# Altium PCB LPCB278R0.PcbDoc
Units mm, origin at the board's own origin, x right, y up, seen from the top; angles counter-clockwise.
Board outline 96 x 79 mm, 2 copper layers (Top Layer, Bottom Layer); 75 components, 36 nets, 248 pads, 492 vias.
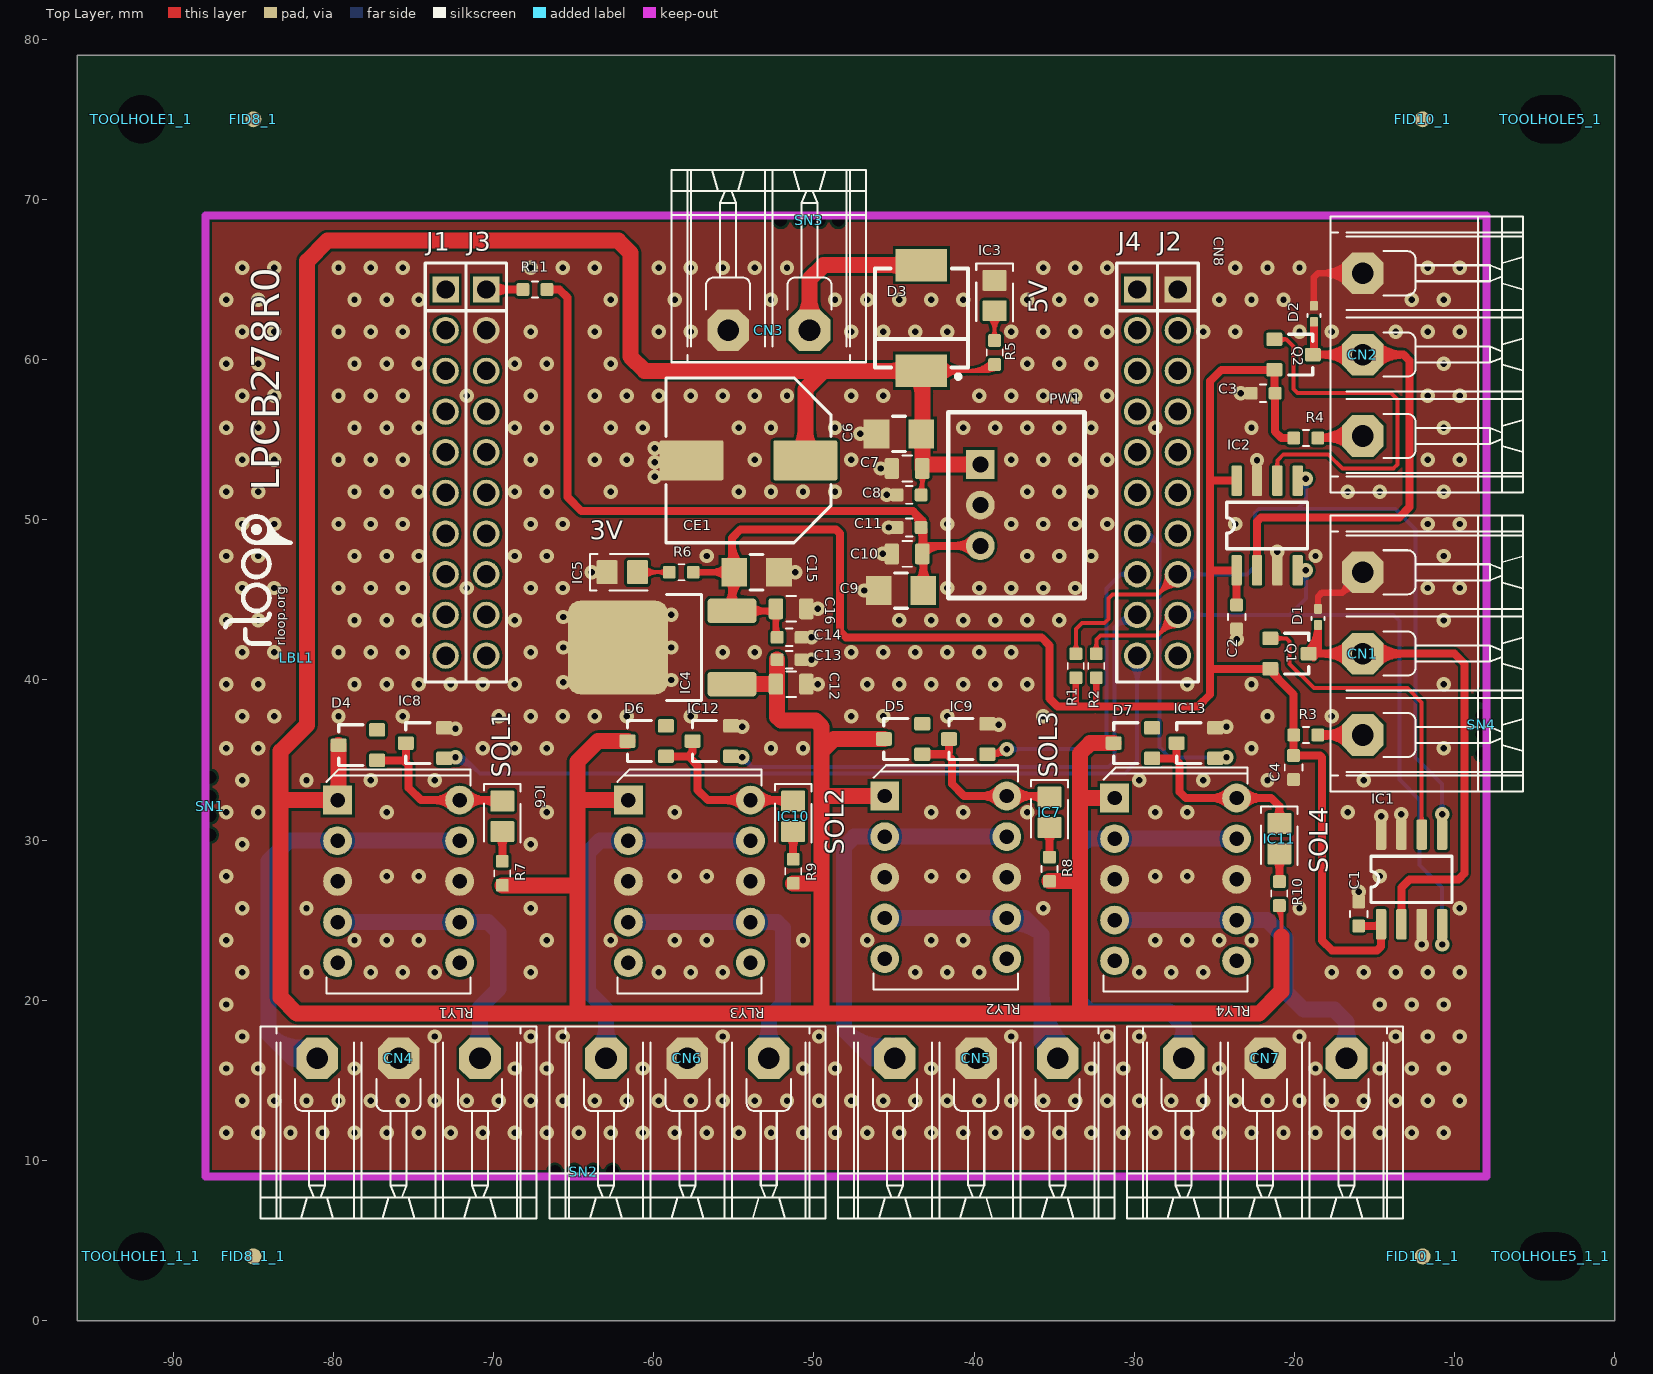
[diagram p0: Top Layer view]
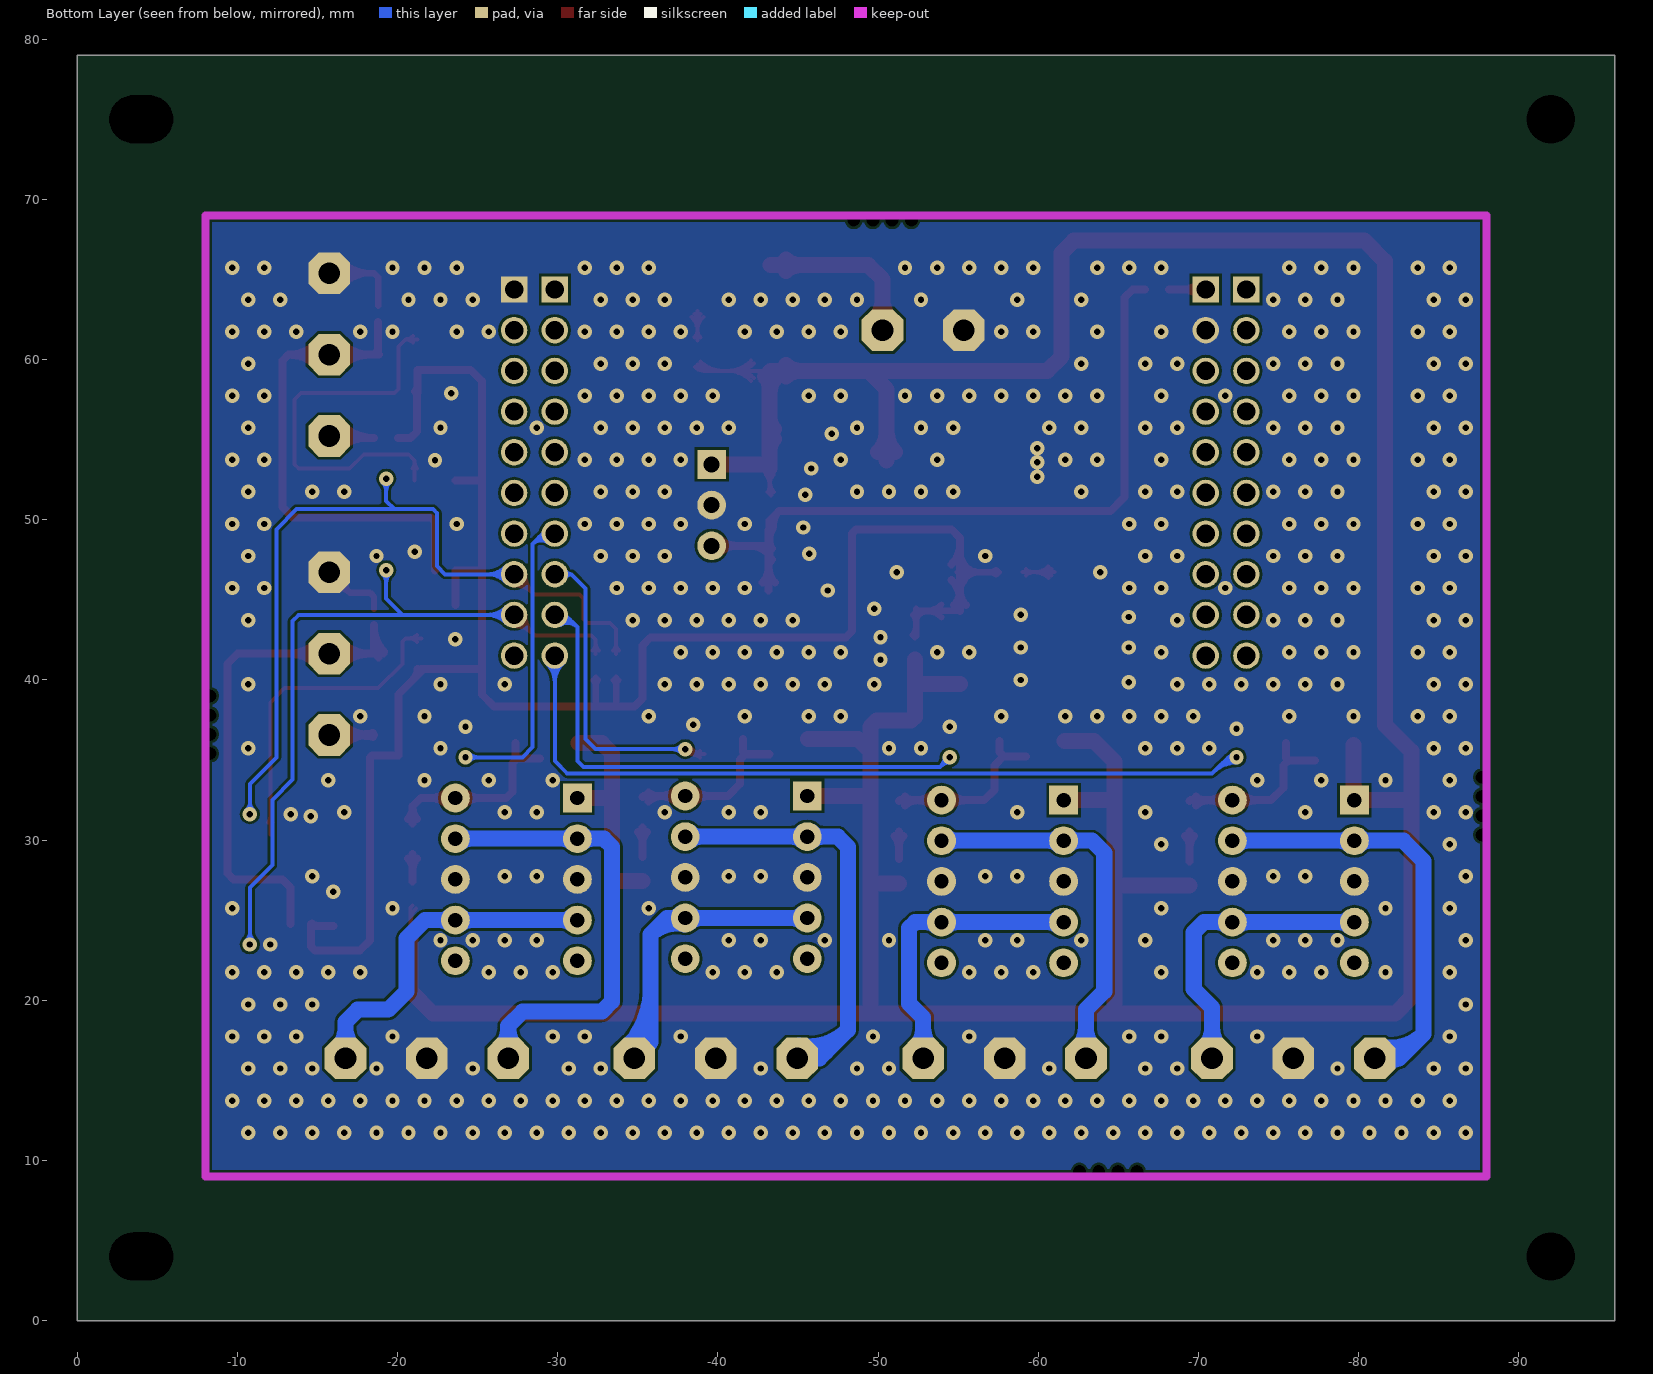
[diagram p1: Bottom Layer view, seen from below]

## Layer stack, top to bottom
Top Layer: signal copper 0.0356
Dielectric: dielectric 0.32, FR-4, Dk 4.8
Bottom Layer: signal copper 0.0356

## Board outline
-96,0 -96,79 0,79 0,0

## Design rules (kind name [scope] priority, off if disabled: settings)
Clearance [All] p1: gap=0.16
Height [All] p1 off: minheight=0 maxheight=25.4 prefheight=12.7
HoleSize [All] p1: absolutevalues=TRUE maxlimit=6 minlimit=0.025 maxpercent=80.000 minpercent=20.000
MinimumSolderMaskSliver [All] p1 off: minsoldermaskwidth=0.1
PlaneConnect PlaneConnect_1 [IsVia] p1: planeconnectstyle=Direct reliefexpansion=0.508 reliefentries=4 reliefconductorwidth=0.254 reliefairgap=0.254
PlaneConnect [All] p2: planeconnectstyle=Relief reliefexpansion=0.508 reliefentries=4 reliefconductorwidth=0.254 reliefairgap=0.254
PolygonConnect [IsVia] p1: connectstyle=Direct reliefconductorwidth=0.254 reliefentries=4 polygonreliefangle="90 Angle" airgapwidth=0.254
PolygonConnect PolygonConnect_1 [All] p2: connectstyle=Direct reliefconductorwidth=0.254 reliefentries=4 polygonreliefangle="90 Angle" airgapwidth=0.254
RoutingVias [All] p1: holewidth=0.6 width=1.2 viastyle="Through Hole" minholewidth=0.3 minwidth=0.6 maxholewidth=1 maxwidth=2
SilkToSilkClearance [All] p1 off: silktosilkclearance=0.1
SilkToSolderMaskClearance [IsPad] p1 off: minsilkscreentomaskgap=0.1 clearancetoexposedcopper=TRUE
SolderMaskExpansion [All] p1: expansion=0.102
Width [All] p1: maxlimit=1 minlimit=0.16 preferedwidth=0.2
22 further rules are at their usual default settings.

## Classes and differential pairs
component class "LPCB278 - TOP": LBL1 SN1 SN2 SN3 SN4
component class "U_LPCB278 - 1 WIRE": C1 C2 C3 C4 CN1 CN2 D1 D2 IC1 IC2 Q1 Q2 R1 R2 R3 R4
component class "U_LPCB278 - POWER": C6 C7 C8 C9 C10 C11 C12 C13 C14 C15 C16 CE1 CN3 D3 IC3 IC4 IC5 PW1 R5 R6
component class "U_LPCB278 - RELAYS": CN4 CN5 CN6 CN7 D4 D5 D6 D7 IC6 IC7 IC8 IC9 IC10 IC11 IC12 IC13 R7 R8 R9 R10 RLY1 RLY2 RLY3 RLY4
component class "U_LPCB278 - RM57 LAUNCH": CN8 R11

## Components (designator, comment, footprint, x,y, rotation, side; value= is the part's Value field where it differs from the comment)
C1 "100n / 50V / 10% / SMD 0603" LFP011__CC1608-0603-IPC7351_B -15.991,25.383 r90 top
C2 "100n / 50V / 10% / SMD 0603" LFP011__CC1608-0603-IPC7351_B -23.611,43.925 r270 top
C3 "1uF / 10V / 10% / SMD 0603" LFP011__CC1608-0603-IPC7351_B -21.96,57.895 r180 top
C4 "1uF / 10V / 10% / SMD 0603" LFP011__CC1608-0603-IPC7351_B -20.055,34.527 r270 top
C6 "10uF / 50V / 10% / SMD 1206" LFP043__CC3216-1206 -44.693,55.355 r180 top
C7 "1uF / 50V / 10% / SMD 0805" LFP010__CC2012-0805-IPC7351_B -44.185,53.196 r180 top
C8 "100nF / 50V / 10% / SMD 0603" LFP011__CC1608-0603-IPC7351_B -44.058,51.545 r180 top
C9 "10uF / 50V / 10% / SMD 1206" LFP043__CC3216-1206 -44.566,45.576 r180 top
C10 "1uF / 50V / 10% / SMD 0805" LFP010__CC2012-0805-IPC7351_B -44.185,47.862 r180 top
C11 "100nF / 50V / 10% / SMD 0603" LFP011__CC1608-0603-IPC7351_B -44.058,49.513 r180 top
C12 "1uF / 50V / 10% / SMD 0805" LFP010__CC2012-0805-IPC7351_B -51.424,39.734 r0 top
C13 "100nF / 50V / 10% / SMD 0603" LFP011__CC1608-0603-IPC7351_B -51.551,41.258 r0 top
C14 "100nF / 50V / 10% / SMD 0603" LFP011__CC1608-0603-IPC7351_B -51.551,42.655 r0 top
C15 "10uF / 50V / 10% / SMD 1206" LFP043__CC3216-1206 -53.583,46.719 r0 top
C16 "1uF / 50V / 10% / SMD 0805" LFP010__CC2012-0805-IPC7351_B -51.424,44.433 r0 top
CE1 "330uF / 35V / 20% / SMD 10x10" LFP041__NICHICON_WT_10X10 -54.091,53.704 r180 top
CN1 "691 313 510 003" "691 313 510 003" -15.737,36.559 r90 top locked
CN2 "691 313 510 003" "691 313 510 003" -15.737,55.228 r90 top locked
CN3 "691 313 510 002" "691 313 510 002" -50.281,61.832 r180 top
CN4 "691 313 510 003" "691 313 510 003" -81.015,16.366 r0 top locked
CN5 "691 313 510 003" "691 313 510 003" -44.947,16.366 r0 top locked
CN6 "691 313 510 003" "691 313 510 003" -62.981,16.366 r0 top locked
CN7 "691 313 510 003" "691 313 510 003" -26.913,16.366 r0 top locked
CN8 "RM57LAUNCHXL_BP_40P_1" RM57LAUNCHXL_BP_40P_1 -73,64.372 r0 top locked
D1 "TPD1E10B09" LFP157__R-PX1SON-N2 -18.531,43.925 r270 top
D2 "TPD1E10B09" LFP157__R-PX1SON-N2 -18.785,62.848 r270 top
D3 "S3M-E3/57T" LFP040__DO-214AB -43.296,62.594 r90 top
D4 "BAS16" LFP021__SOT23 -78.475,35.924 r90 top
D5 "BAS16" LFP021__SOT23 -44.439,36.305 r90 top
D6 "BAS16" LFP021__SOT23 -60.441,36.178 r90 top
D7 "BAS16" LFP021__SOT23 -30.088,36.051 r90 top
FID8_1 "FIDUCIAL" LFP113__FIDUCIAL -85,75 r0 top
FID8_1_1 "FIDUCIAL" LFP113__FIDUCIAL -85,4 r0 top
FID10_1 "FIDUCIAL" LFP113__FIDUCIAL -12,75 r0 top
FID10_1_1 "FIDUCIAL" LFP113__FIDUCIAL -12,4 r0 top
IC1 "DS2482S-100+T&R" LFP069__R-8G -12.689,27.542 r0 top
IC2 "DS2482S-100+T&R" LFP069__R-8G -21.706,49.64 r0 top
IC3 "EL-17-21VGC/TR8" CR2012-0805-LED -38.724,63.991 r270 top
IC4 "NCV4274DT33RKG" LFP019__369A-13 -59.679,42.02 r90 top
IC5 "EL-17-21VGC/TR8" CR2012-0805-LED -61.965,46.719 r0 top
IC6 "EL-17-21VGC/TR8" CR2012-0805-LED -69.458,31.479 r270 top
IC7 "EL-17-21VGC/TR8" CR2012-0805-LED -35.295,31.733 r270 top
IC8 "NUD3124LT1G" LFP021__SOT23 -74.284,36.051 r90 top
IC9 "NUD3124LT1G" LFP021__SOT23 -40.375,36.305 r90 top
IC10 "EL-17-21VGC/TR8" CR2012-0805-LED -51.297,31.479 r270 top
IC11 "EL-17-21VGC/TR8" CR2012-0805-LED -20.944,30.082 r270 top
IC12 "NUD3124LT1G" LFP021__SOT23 -56.377,36.178 r90 top
IC13 "NUD3124LT1G" LFP021__SOT23 -26.151,36.051 r90 top
LBL1 "RLOOP_LOGO" RLOOP_LOGO -82.285,41.385 r90 top
PW1 "173010542" 173010542 -39.613,50.91 r270 top
Q1 "BSS84" LFP021__SOT23 -20.309,41.639 r270 top
Q2 "BSS84" LFP021__SOT23 -20.055,60.308 r270 top
R1 "4.7K / 0.1W / 1% / SMD 0603" LFP020__CR1608-0603-IPC7351_B -33.644,40.877 r270 top
R2 "4.7K / 0.1W / 1% / SMD 0603" LFP020__CR1608-0603-IPC7351_B -32.374,40.877 r270 top
R3 "0R / 0.1W / SMD 0603" LFP020__CR1608-0603-IPC7351_B -19.293,36.559 r0 top
R4 "0R / 0.1W / SMD 0603" LFP020__CR1608-0603-IPC7351_B -19.293,55.101 r0 top
R5 "2.2K / 0.1W / 1% / SMD 0603" LFP020__CR1608-0603-IPC7351_B -38.724,60.435 r270 top
R6 "2.2K / 0.1W / 1% / SMD 0603" LFP020__CR1608-0603-IPC7351_B -58.282,46.719 r0 top
R7 "2.2K / 0.1W / 1% / SMD 0603" LFP020__CR1608-0603-IPC7351_B -69.458,27.923 r90 top
R8 "2.2K / 0.1W / 1% / SMD 0603" LFP020__CR1608-0603-IPC7351_B -35.295,28.177 r90 top
R9 "2.2K / 0.1W / 1% / SMD 0603" LFP020__CR1608-0603-IPC7351_B -51.297,28.05 r90 top
R10 "2.2K / 0.1W / 1% / SMD 0603" LFP020__CR1608-0603-IPC7351_B -20.944,26.653 r90 top
R11 "0R / 0.1W / SMD 0603" LFP020__CR1608-0603-IPC7351_B -67.426,64.372 r0 top
RLY1 "TQ2-24" TQ2 -75.935,27.415 r270 top
RLY2 "TQ2-24" TQ2 -41.772,27.669 r270 top
RLY3 "TQ2-24" TQ2 -57.774,27.415 r270 top
RLY4 "TQ2-24" TQ2 -27.421,27.542 r270 top
SN1 "PCB_SNAPOUT_0.3MM" PCB_SNAPOUT_0.3MM -88,32.114 r270 top
SN2 "PCB_SNAPOUT_0.3MM" PCB_SNAPOUT_0.3MM -64.378,9 r0 top
SN3 "PCB_SNAPOUT_0.3MM" PCB_SNAPOUT_0.3MM -50.281,69 r180 top
SN4 "PCB_SNAPOUT_0.3MM" PCB_SNAPOUT_0.3MM -8,37.194 r90 top
TOOLHOLE1_1 "Comment" TOOL-1#1 -92,75 r0 top
TOOLHOLE1_1_1 "Comment" TOOL-1#1 -92,4 r0 top
TOOLHOLE5_1 "Comment" TOOL-1#2 -4,75 r0 top
TOOLHOLE5_1_1 "Comment" TOOL-1#2 -4,4 r0 top

## Footprints (in the part's own frame and the unit in brackets; to place one, negate y for a bottom-side part, rotate by r counter-clockwise, add the part's x,y. Pads: shape width x height; smd on the part's side, far side on the other; paste and mask are expansions set on the pad)
"691 313 510 002" [mm] "Connector, Pluggable Terminal Block, 5.08mm, 2 Way, PTH"
  oct 2.6x2.6 hole 1.35: 1(0,0) 2(5.08,0)
  silkscreen extent -3.54,-10 8.62,2
"691 313 510 003" [mm] "Connector, Pluggable Terminal Block, 5.08mm, 3 Way, PTH"
  oct 2.6x2.6 hole 1.35: 1(0,0) 2(5.08,0) 3(10.16,0)
  silkscreen extent -3.54,-10 13.7,2
173010542 [mm]
  rect 1.8x1.8 hole 1 paste-0.01: 1(-2.54,0)
  round 1.8 hole 1 paste-0.01: 2(0,0) 3(2.54,0)
  silkscreen extent -5.8,-2 5.8,6.5
CR2012-0805-LED [mm]
  rrect10% 1.3x1.5 smd paste-0.05: A(0.95,0) K(-0.95,0)
  silkscreen extent -2.01,-1.14 1.63,1.14
LFP010__CC2012-0805-IPC7351_B [mm]
  rrect25% 0.9x1.3 smd paste-0.01: 1(-0.95,0) 2(0.95,0)
  silkscreen extent -0.3,-0.8 0.3,0.8
LFP011__CC1608-0603-IPC7351_B [mm]
  rrect25% 0.8x0.8 smd: 1(-0.75,0) 2(0.75,0)
  silkscreen extent -0.2,-0.55 0.2,0.55
LFP019__369A-13 [mil]
  rrect25% 60x120 smd: 1(-90,-179.49) 3(90,-179.49)
  rrect25% 230x245 smd paste-196.85: 4(0,100.75)
  silkscreen extent -130,-104 130,-19
LFP020__CR1608-0603-IPC7351_B [mm]
  rrect25% 0.8x0.8 smd: 1(-0.75,0) 2(0.75,0)
  silkscreen extent -0.2,-0.5 0.2,0.5
LFP021__SOT23 [mm] "SOT-23; 3 Leads; Body 3.0 x 2.5 mm, inc. leads (LxW max)"
  rrect25% 0.85x1 smd paste-0.05: 1(-0.95,-1.2) 2(0.95,-1.2) 3(0,1.2)
  silkscreen extent -1.27,-0.3 1.28,1.2
LFP040__DO-214AB [mm]
  rect 2.032x3.2 smd: 1(-3.3,0) 2(3.3,0)
  silkscreen extent -3.8,-2.9 3.1,2.9
LFP041__NICHICON_WT_10X10 [mm]
  rrect10% 4x2.5 smd paste-0.02: 1(-3.55,0) 2(3.55,0)
  silkscreen extent -5.15,-5.15 5.15,5.15
LFP043__CC3216-1206 [mm]
  rect 1.6x1.8 smd paste-0.01: 1(-1.4,0) 2(1.4,0)
  silkscreen extent -0.4,-1.1 0.4,1.1
LFP069__R-8G [mm] "Small Outline; 8 Leads; Body Width 3.9 mm; Pitch 1.27 mm"
  rrect25% 0.65x1.9 smd paste-0.05: 1(-1.905,-2.8) 2(-0.635,-2.8) 3(0.635,-2.8) 4(1.905,-2.8) 5(1.905,2.8) 6(0.635,2.8) 7(-0.635,2.8) 8(-1.905,2.8)
  silkscreen extent -2.52,-1.45 2.52,1.45
LFP113__FIDUCIAL [mm]
  round 1 smd paste-2 mask+1.5: 0(0,0)
LFP157__R-PX1SON-N2 [mm]
  rrect25% 0.6x0.5 smd: 2(0.5,0) G(-0.5,0)
  silkscreen extent 0,-0.4 0.2,0.4
PCB_SNAPOUT_0.3MM [mm]
  round 0.4 hole 0.8 unplated: 0(-1.8,0.3) 0(-0.6,0.3) 0(0.6,0.3) 0(1.8,0.3)
RLOOP_LOGO [mm]
  silkscreen extent 0.89,0.39 8.82,4.45
RM57LAUNCHXL_BP_40P_1 [mm]
  rect 1.65x1.65 hole 1.15: J1_1(0,0) J2_1(45.72,0) J3_1(2.54,0) J4_1(43.18,0)
  round 1.65 hole 1.15: J1_2(0,-2.54) J1_3(0,-5.08) J1_4(0,-7.62) J1_5(0,-10.16) J1_6(0,-12.7) J1_7(0,-15.24) J1_8(0,-17.78) J1_9(0,-20.32) J1_10(0,-22.86) J2_2(45.72,-2.54) J2_3(45.72,-5.08) J2_4(45.72,-7.62) J2_5(45.72,-10.16) J2_6(45.72,-12.7) J2_7(45.72,-15.24) J2_8(45.72,-17.78) J2_9(45.72,-20.32) J2_10(45.72,-22.86) J3_2(2.54,-2.54) J3_3(2.54,-5.08) J3_4(2.54,-7.62) J3_5(2.54,-10.16) J3_6(2.54,-12.7) J3_7(2.54,-15.24) J3_8(2.54,-17.78) J3_9(2.54,-20.32) J3_10(2.54,-22.86) J4_2(43.18,-2.54) J4_3(43.18,-5.08) J4_4(43.18,-7.62) J4_5(43.18,-10.16) J4_6(43.18,-12.7) J4_7(43.18,-15.24) J4_8(43.18,-17.78) J4_9(43.18,-20.32) J4_10(43.18,-22.86)
  silkscreen extent -1.27,-24.51 46.99,1.65, body extent -1.27,-24.43 46.99,1.57, height 8.59
TOOL-1#1 [mm]
  round 2.54 hole 3 unplated: TOOL(0,0)
TOOL-1#2 [mm]
  round 0.076 hole 3 slot 4 at 0 deg unplated: TOOL1(0,0)
TQ2 [mm]
  rect 1.8x1.8 hole 0.9: 1(-5.08,-3.81)
  round 1.8 hole 0.9: 2(-2.54,-3.81) 3(0,-3.81) 4(2.54,-3.81) 5(5.08,-3.81) 6(5.08,3.81) 7(2.54,3.81) 8(0,3.81) 9(-2.54,3.81) 10(-5.08,3.81)
  silkscreen extent -7,-4.5 7,4.5

## Part data
C1 C2 C8 C11 C13 C14: "Capacitor, Ceramic Chip, 100nF (0.1uF), 50V, 5%, SMD 0603 [LCA016]"
C3 C4: "Capacitor, Ceramic Chip, 1uF, 10V, SMD 0603 [LCA070]"
C6 C9 C15: "Capacitor, Ceramic Chip, 10uF, 50V, X5R, 10%, SMD 1206 [LCA144]"
C7 C10 C12 C16: "Capacitor, Ceramic Chip, 1uF, 50V, SMD 0805 [LCA098]"
CE1: "Capacitor, Aluminum Electrolytic, 330uF, 35V, 20%, SMD (10mm x 10mm) [LCA071]"
CN1 CN2 CN4 CN5 CN6 CN7: "Connector, Pluggable Terminal Block, 5.08mm, 3 Way, PTH"
CN3: "Connector, Pluggable Terminal Block, 5.08mm, 2 Way, PTH"
CN8: "Connector, RM57L843 LaunchXL, 40Pin Boosterpack Site1"
D1 D2: "Diode, ESD Protecion, 10pF, 9V Breakdown, SMD 0402 [LIC621]"
D3: "Diode, General Purpose Rectifier, 3A, 200V, SMD DO-214AB [LIC189]"
D4 D5 D6 D7: "Diode, Small Signal, 0.2A, 85V, SMD SOT-23 [LIC006]"
IC1 IC2: "IC, I2C to 1 Wire Bridge, SMD SOIC8"
IC3 IC5 IC6 IC7 IC10 IC11: "LED, SMD, 0805 Green [LIC016]"
IC4: "IC, Voltage Regulator, 400mA, 3.3V LDO, SMD DPAK [LIC233]"
IC8 IC9 IC12 IC13: "IC, Relay Driver, 28V Industrial, SMD SOT23 [LIC292]"
Q1 Q2: "FET, P Channel, Logic Level, SMD SOT23 [LIC215]"
R1 R2: "Resistor, Ceramic Chip, 4K7, 0.1W, 1%, SMD 0603 [LRE058]"
R3 R4 R11: "Resistor, Ceramic Chip, 0R, 0.1W, SMD 0603 [LRE026]"
R5 R6 R7 R8 R9 R10: "Resistor, Ceramic Chip, 2.2K, 0.1W, 1%, SMD 0603 [LRE027]"
RLY1 RLY2 RLY3 RLY4: "Relay, DPDT, Non Latching, 24VDC Coil, 1A Rating, PTH"
SN1 SN2 SN3 SN4: "PCB Snapout + 0.3mm"

## Via types
v1: diameter 0.9, hole 0.4, Top Layer to Bottom Layer, tented both sides, 492 vias

## Nets (pads, with @x,y where several pads share a name; then routed paths per layer and width w, separated by ;. In a path a pad name is that pad's centre, name@x,y a point inside that pad or via, vN(x,y) a via of type N, cw(c..) or ccw(c..) an arc to the next point about the centre after c; other vN are vias at no path point)
D3V3: C1.1 C2.1 C3.1 C4.1 C14.1 C15.1 C16.1 IC1.1 IC2.1 IC2.8 IC4.3 Q1.2 Q2.2 R1.2 R2.2 R3.1 R4.1 R6.2 | length 136.8
  Top Layer w0.4: R6.2 -55.12,46.719 C15.1 ; R6.2@-57.391,46.578 cw(c-57.049,46.236) -57.049,46.719 cw(c-57.049,47.202) R6.2@-57.391,46.86 ; C15.1@-55.407,46.295 ccw(c-56.432,45.27) -56.432,46.719 ccw(c-56.432,48.168) C15.1@-55.407,47.143 ; IC4.3 -52.501,44.306 C16.1 -52.374,42.728 C14.1 ; IC4.3@-53.961,43.909 cw(c-53.001,42.949) -53.001,44.306 cw(c-53.001,45.663) IC4.3@-53.961,44.703 ; -53.154,44.306 cw(c-53.154,43.453) -52.551,44.056 cw(c-52.978,43.629) -52.374,43.629 cw(c-51.77,43.629) C16.1@-52.197,44.056 ; -52.374,43.314 ccw(c-51.642,43.314) C14.1@-52.16,42.796 ; R1.2@-33.785,39.986 cw(c-34.127,39.644) -33.644,39.644 cw(c-33.161,39.644) R1.2@-33.503,39.986 ; -33.644,38.337 R1.2 ; R2.2@-32.515,39.986 cw(c-32.857,39.644) -32.374,39.644 cw(c-31.891,39.644) R2.2@-32.233,39.986 ; -32.501,38.337 -32.374,38.337 R2.2
  Top Layer w0.5: IC4.3@-55.482,44.668 ccw(c-56.356,45.542) -55.12,45.542 ccw(c-53.884,45.542) IC4.3@-54.758,44.668 ; C15.1@-55.372,46.23 cw(c-55.98,45.622) -55.12,45.622 ; C15.1@-55.372,47.208 ccw(c-55.98,47.816) -55.12,47.816 ; IC4.3 -55.12,46.719 -55.12,48.865 -54.599,49.386 -48.63,49.386 -48.376,49.132 -48.376,43.036 -47.995,42.655 -35.803,42.655 -35.295,42.147 -35.295,38.845 -34.787,38.337 -33.644,38.337 -32.501,38.337 ; IC4.3@-55.12,44.96 cw(c-53.324,44.96) C15.1@-54.594,46.23 ; -55.12,48.478 ccw(c-53.324,48.478) C15.1@-54.594,47.208 ; -32.374,38.337 -26.024,38.337 -25.262,39.099 -25.262,40.75 ; C2.1 IC2.1 -25.256,46.84 -25.262,46.846 ; IC2.8 -25.141,52.44 -25.262,52.561 ; Q1.2@-21.259,40.689 ccw(c-20.327,40.689) -20.986,40.03 ; -21.255,58.366 ccw(c-20.739,58.366) C3.1@-21.104,58.001 ; R4.1 -20.817,55.101 -21.21,55.494 C3.1 -21.255,57.94 Q2.2 -24.561,59.358 -25.262,58.657 -25.262,52.561 ; C1.1 -14.703,24.633 IC1.1 -14.594,23.351 -14.848,23.097 -17.642,23.097 -18.277,23.732 -18.277,35.162 -18.392,35.277 C4.1 -20.055,39.099 -21.509,40.553 Q1.2 -25.201,40.689 -25.262,40.75 ; -15.038,24.633 ccw(c-15.038,25.186) IC1.1@-14.647,24.795 ; -25.262,40.75 -25.262,46.846 ; -25.262,46.846 -25.262,52.561
DGND: C1.2 C2.2 C3.2 C4.2 C6.2 C7.2 C8.2 C9.2 C10.2 C11.2 C12.2 C13.2 C14.2 C15.2 C16.2 CE1.2 CN1.3 CN2.3 CN3.2 CN4.2 CN5.2 CN6.2 CN7.2 CN8.J2_1 CN8.J3_2 D1.G D2.G IC1.3 IC1.7 IC1.8 IC2.3 IC2.7 IC3.K IC4.4 IC5.K IC8.2 IC9.2 IC12.2 IC13.2 PW1.2 RLY1.3 RLY1.8 RLY2.3 RLY2.8 RLY3.3 RLY3.8 RLY4.3 RLY4.8 | length 18
  Top Layer w0.4: D2.G -18.785,65.134 -18.531,65.388 CN2.3 ; D1.G -18.531,45.195 -18.277,45.449 -17.007,45.449 ; CN1.3@-16.783,46.38 cw(c-17.655,46.097) -17.007,45.449 ; CN2.3@-16.515,64.61 ccw(c-18.393,62.732) -18.393,65.388 ccw(c-18.393,68.044) CN2.3@-16.515,66.166 ; CN2.3@-16.232,64.893 ccw(c-17.427,63.698) -17.427,65.388 ccw(c-17.427,67.078) CN2.3@-16.232,65.883 ; CN1.3@-16.076,45.673 ccw(c-16.359,44.801) -17.007,45.449 ; CN1.3 -17.007,45.449
  other v1: -86.685,11.732 -84.685,11.732 -82.685,11.732 -80.685,11.732 -78.685,11.732 -76.685,11.732 -74.685,11.732 -72.685,11.732 -70.685,11.732 -68.685,11.732 -66.685,11.732 -64.685,11.732 -62.685,11.732 -60.685,11.732 -58.685,11.732 -56.685,11.732 -54.685,11.732 -52.685,11.732 -50.685,11.732 -48.685,11.732 -46.685,11.732 -44.685,11.732 -42.685,11.732 -40.685,11.732 -38.685,11.732 -36.685,11.732 -34.685,11.732 -32.685,11.732 -30.685,11.732 -28.685,11.732 -26.685,11.732 -24.685,11.732 -22.685,11.732 -20.685,11.732 -18.685,11.732 -16.685,11.732 -14.685,11.732 -12.685,11.732 -10.685,11.732 -85.685,13.732 -83.685,13.732 -81.685,13.732 -79.685,13.732 -77.685,13.732 -75.685,13.732 -73.685,13.732 -71.685,13.732 -69.685,13.732 -67.685,13.732 -65.685,13.732 -63.685,13.732 -61.685,13.732 -59.685,13.732 -57.685,13.732 -55.685,13.732 -53.685,13.732 -51.685,13.732 -49.685,13.732 -47.685,13.732 -45.685,13.732 -43.685,13.732 -41.685,13.732 -39.685,13.732 -37.685,13.732 -35.685,13.732 -33.685,13.732 -31.685,13.732 -29.685,13.732 -27.685,13.732 -25.685,13.732 -23.685,13.732 -21.685,13.732 -19.685,13.732 -17.685,13.732 -15.685,13.732 -13.685,13.732 -11.685,13.732 -9.685,13.732 -86.685,15.732 -84.685,15.732 -78.685,15.732 -68.685,15.732 -66.685,15.732 -60.685,15.732 -50.685,15.732 -48.685,15.732 -42.685,15.732 -32.685,15.732 -30.685,15.732 -24.685,15.732 -18.685,15.732 -14.685,15.732 -12.685,15.732 -10.685,15.732 -85.685,17.732 -73.685,17.732 -67.685,17.732 -65.685,17.732 -55.685,17.732 -49.685,17.732 -37.685,17.732 -31.685,17.732 -29.685,17.732 -19.685,17.732 -13.685,17.732 -11.685,17.732 -9.685,17.732 -86.685,19.732 -14.685,19.732 -12.685,19.732 -10.685,19.732 -85.685,21.732 -81.685,21.732 -77.685,21.732 -75.685,21.732 -73.685,21.732 -67.685,21.732 -59.685,21.732 -57.685,21.732 -55.685,21.732 -43.685,21.732 -41.685,21.732 -39.685,21.732 -29.685,21.732 -27.685,21.732 -25.685,21.732 -17.685,21.732 -15.685,21.732 -13.685,21.732 -11.685,21.732 -9.685,21.732 -12.054,23.478 -86.685,23.732 -78.685,23.732 -76.685,23.732 -74.685,23.732 -66.685,23.732 -62.685,23.732 -58.685,23.732 -56.685,23.732 -50.685,23.732 -46.685,23.732 -42.685,23.732 -40.685,23.732 -28.685,23.732 -26.685,23.732 -24.685,23.732 -22.685,23.732 -85.685,25.732 -81.685,25.732 -67.685,25.732 -35.685,25.732 -19.685,25.732 -9.685,25.732 -15.991,26.78 -86.685,27.732 -76.685,27.732 -74.685,27.732 -58.685,27.732 -56.685,27.732 -42.685,27.732 -40.685,27.732 -28.685,27.732 -26.685,27.732 -14.685,27.732 -85.685,29.732 -67.685,29.732 -14.594,31.479 -13.324,31.606 -86.685,31.732 -84.685,31.732 -76.685,31.732 -66.685,31.732 -58.685,31.732 -42.685,31.732 -40.685,31.732 -36.685,31.732 -28.685,31.732 -26.685,31.732 -16.685,31.732 -85.685,33.732 -81.685,33.732 -77.685,33.732 -73.685,33.732 -29.685,33.732 -25.685,33.732 -21.685,33.732 -15.685,33.732 -86.685,35.732 -84.685,35.732 -70.685,35.732 -68.685,35.732 -66.685,35.732 -52.685,35.732 -50.685,35.732 -22.685,35.732 -10.685,35.732 -72.379,36.94 -54.472,37.067 -24.246,37.067 -38.47,37.194 -85.685,37.732 -83.685,37.732 -79.685,37.732 -75.685,37.732 -69.685,37.732 -67.685,37.732 -65.685,37.732 -63.685,37.732 -61.685,37.732 -57.685,37.732 -47.685,37.732 -45.685,37.732 -41.685,37.732 -35.685,37.732 -21.685,37.732 -17.685,37.732 -86.685,39.732 -84.685,39.732 -78.685,39.732 -76.685,39.732 -74.685,39.732 -72.685,39.732 -70.685,39.732 -68.685,39.732 -49.773,39.734 -46.685,39.732 -44.685,39.732 -42.685,39.732 -40.685,39.732 -38.685,39.732 -36.685,39.732 -26.685,39.732 -22.685,39.732 -10.685,39.732 -65.648,39.861 -58.917,39.988 -50.154,41.258 -85.685,41.732 -83.685,41.732 -79.685,41.732 -77.685,41.732 -75.685,41.732 -67.685,41.732 -55.685,41.732 -53.685,41.732 -47.685,41.732 -45.685,41.732 -43.685,41.732 -41.685,41.732 -39.685,41.732 -37.685,41.732 -65.648,42.02 -58.917,42.02 -23.611,42.528 -50.154,42.655 -86.685,43.732 -84.685,43.732 -78.685,43.732 -76.685,43.732 -74.685,43.732 -68.685,43.732 -44.685,43.732 -42.685,43.732 -40.685,43.732 -38.685,43.732 -36.685,43.732 -34.685,43.732 -10.685,43.732 -65.648,43.925 -58.917,44.052 -49.773,44.433 -46.852,45.576 -85.685,45.732 -83.685,45.732 -79.685,45.732 -77.685,45.732 -75.685,45.732 -71.685,45.732 -67.685,45.732 -65.685,45.732 -41.685,45.732 -39.685,45.732 -37.685,45.732 -35.685,45.732 -33.685,45.732 -11.685,45.732 -9.685,45.732 -63.87,46.719 -51.17,46.719 -86.685,47.732 -84.685,47.732 -78.685,47.732 -76.685,47.732 -74.685,47.732 -68.685,47.732 -66.685,47.732 -56.685,47.732 -36.685,47.732 -34.685,47.732 -32.685,47.732 -18.685,47.732 -10.685,47.732 -45.709,47.862 -21.071,47.989 -45.328,49.513 -85.685,49.732 -83.685,49.732 -79.685,49.732 -77.685,49.732 -75.685,49.732 -67.685,49.732 -65.685,49.732 -41.685,49.732 -37.685,49.732 -35.685,49.732 -33.685,49.732 -31.685,49.732 -23.685,49.732 -11.685,49.732 -9.685,49.732 -45.455,51.545 -86.685,51.732 -84.685,51.732 -78.685,51.732 -76.685,51.732 -74.685,51.732 -68.685,51.732 -66.685,51.732 -62.685,51.732 -54.685,51.732 -52.685,51.732 -50.685,51.732 -48.685,51.732 -36.685,51.732 -34.685,51.732 -32.685,51.732 -16.685,51.732 -14.685,51.732 -10.685,51.732 -59.933,52.688 -45.836,53.196 -59.933,53.577 -22.341,53.704 -85.685,53.732 -83.685,53.732 -79.685,53.732 -77.685,53.732 -75.685,53.732 -67.685,53.732 -63.685,53.732 -61.685,53.732 -53.685,53.732 -47.685,53.732 -37.685,53.732 -35.685,53.732 -33.685,53.732 -31.685,53.732 -11.685,53.732 -9.685,53.732 -59.933,54.466 -47.106,55.355 -86.685,55.732 -84.685,55.732 -78.685,55.732 -76.685,55.732 -74.685,55.732 -68.685,55.732 -66.685,55.732 -62.685,55.732 -60.685,55.732 -54.685,55.732 -52.685,55.732 -48.685,55.732 -40.685,55.732 -38.685,55.732 -36.685,55.732 -34.685,55.732 -32.685,55.732 -28.685,55.732 -22.685,55.732 -10.685,55.732 -85.685,57.732 -83.685,57.732 -79.685,57.732 -77.685,57.732 -75.685,57.732 -71.685,57.732 -67.685,57.732 -63.685,57.732 -61.685,57.732 -59.685,57.732 -57.685,57.732 -55.685,57.732 -53.685,57.732 -51.685,57.732 -47.685,57.732 -45.685,57.732 -39.685,57.732 -37.685,57.732 -35.685,57.732 -33.685,57.732 -31.685,57.732 -11.685,57.732 -9.685,57.732 -23.357,57.895 -86.685,59.732 -84.685,59.732 -78.685,59.732 -76.685,59.732 -74.685,59.732 -68.685,59.732 -66.685,59.732 -62.685,59.732 -36.685,59.732 -34.685,59.732 -32.685,59.732 -10.685,59.732 -85.685,61.732 -83.685,61.732 -79.685,61.732 -77.685,61.732 -75.685,61.732 -67.685,61.732 -63.685,61.732 -59.685,61.732 -57.685,61.732 -47.685,61.732 -45.685,61.732 -43.685,61.732 -41.685,61.732 -37.685,61.732 -35.685,61.732 -33.685,61.732 -31.685,61.732 -25.685,61.732 -23.685,61.732 -19.685,61.732 -17.685,61.732 -13.685,61.732 -11.685,61.732 -9.685,61.732 -86.685,63.732 -84.685,63.732 -78.685,63.732 -76.685,63.732 -74.685,63.732 -62.685,63.732 -58.685,63.732 -52.685,63.732 -48.685,63.732 -46.685,63.732 -44.685,63.732 -42.685,63.732 -40.685,63.732 -36.685,63.732 -34.685,63.732 -32.685,63.732 -24.685,63.732 -22.685,63.732 -20.685,63.732 -12.685,63.732 -10.685,63.732 -85.685,65.732 -83.685,65.732 -79.685,65.732 -77.685,65.732 -75.685,65.732 -67.685,65.732 -65.685,65.732 -63.685,65.732 -59.685,65.732 -57.685,65.732 -55.685,65.732 -53.685,65.732 -51.685,65.732 -35.685,65.732 -33.685,65.732 -31.685,65.732 -23.685,65.732 -21.685,65.732 -19.685,65.732 -11.685,65.732 -9.685,65.732
I2C_SCL: CN8.J2_9 IC1.4 IC2.4 R2.1 | length 57.4
  Top Layer w0.25: R2.1@-32.568,41.821 ccw(c-33.038,42.291) -32.374,42.291 ccw(c-31.71,42.291) R2.1@-32.18,41.821 ; R2.1 -32.374,42.528 -32.12,42.782 -28.55,42.782 CN8.J2_9 ; CN8.J2_9@-27.98,44.052 cw(c-29.67,44.052) -28.475,42.857 cw(c-27.28,41.662) CN8.J2_9@-27.28,43.352 ; CN8.J2_9@-27.73,44.052 cw(c-28.816,44.052) -28.048,43.284 cw(c-27.28,42.516) CN8.J2_9@-27.28,43.602
  Bottom Layer w0.25: CN8.J2_9 -20.309,44.052 ; CN8.J2_9@-26.962,43.734 cw(c-26.194,42.966) -26.194,44.052 cw(c-26.194,45.138) CN8.J2_9@-26.962,44.37 ; CN8.J2_9@-26.785,43.557 cw(c-25.59,42.362) -25.59,44.052 cw(c-25.59,45.742) CN8.J2_9@-26.785,44.547 ; v1@-19.523,46.616 cw(c-20.078,46.061) -19.293,46.061 cw(c-18.508,46.061) v1@-19.063,46.616 ; v1(-19.293,46.846) -19.293,45.068 -20.309,44.052 ; v1@-11.014,23.708 ccw(c-11.569,24.263) -10.784,24.263 ccw(c-9.999,24.263) v1@-10.554,23.708 ; v1(-10.784,23.478) -10.784,27.034 -12.181,28.431 -12.181,32.495 -13.451,33.765 -13.451,43.671 -13.832,44.052 -20.309,44.052
I2C_SDA: CN8.J2_8 IC1.5 IC2.5 R1.1 | length 61.9
  Top Layer w0.25: R1.1@-33.838,41.821 ccw(c-34.308,42.291) -33.644,42.291 ccw(c-32.98,42.291) R1.1@-33.45,41.821 ; R1.1 -33.644,43.163 -33.263,43.544 -31.866,43.544 -31.612,43.798 -31.612,45.068 -31.358,45.322 -28.55,45.322 CN8.J2_8 ; CN8.J2_8@-27.98,46.592 cw(c-29.67,46.592) -28.475,45.397 cw(c-27.28,44.202) CN8.J2_8@-27.28,45.892 ; CN8.J2_8@-27.73,46.592 cw(c-28.816,46.592) -28.048,45.824 cw(c-27.28,45.056) CN8.J2_8@-27.28,46.142
  Bottom Layer w0.25: CN8.J2_8 -22.976,46.592 -22.468,47.1 -22.468,50.402 -22.214,50.656 -19.801,50.656 ; CN8.J2_8@-26.962,46.274 cw(c-26.194,45.506) -26.194,46.592 cw(c-26.194,47.678) CN8.J2_8@-26.962,46.91 ; CN8.J2_8@-26.785,46.097 cw(c-25.59,44.902) -25.59,46.592 cw(c-25.59,48.282) CN8.J2_8@-26.785,47.087 ; v1@-19.523,52.331 cw(c-20.078,51.776) -19.293,51.776 cw(c-18.508,51.776) v1@-19.063,52.331 ; v1(-19.293,52.561) -19.293,51.164 -19.801,50.656 ; v1@-11.014,31.836 ccw(c-11.569,32.391) -10.784,32.391 ccw(c-9.999,32.391) v1@-10.554,31.836 ; v1(-10.784,31.606) -10.784,33.511 -12.435,35.162 -12.435,49.386 -13.705,50.656 -19.801,50.656
NetCN1_1: CN1.1 R3.2 | length 9.8
  Top Layer w0.5: R3.2 CN1.1 ; R3.2@-18.468,36.429 cw(c-18.167,35.908) -18.011,36.489 ; R3.2@-18.468,36.689 ccw(c-18.167,37.21) -18.011,36.629 ; CN1.1@-16.479,35.817 ccw(c-18.272,34.024) -18.272,36.559 ccw(c-18.272,39.094) CN1.1@-16.479,37.301 ; CN1.1@-16.126,36.17 ccw(c-17.065,35.231) -17.065,36.559 ccw(c-17.065,37.887) CN1.1@-16.126,36.948
NetCN1_2: CN1.2 D1.2 IC1.2 Q1.3 | length 46
  Top Layer w0.5: Q1.3@-19.158,41.763 ccw(c-20.671,43.276) D1.2@-18.531,43.276 ; Q1.3 -18.531,41.639 ; Q1.3@-18.804,41.409 ccw(c-19.464,42.069) -18.531,42.069 ; D1.2 -18.531,41.639 ; CN1.2@-16.479,40.897 ccw(c-18.272,39.104) -18.272,41.639 ccw(c-18.272,44.174) CN1.2@-16.479,42.381 ; CN1.2@-16.126,41.25 ccw(c-17.065,40.311) -17.065,41.639 ccw(c-17.065,42.967) CN1.2@-16.126,42.028 ; CN1.2@-15.348,41.25 cw(c-14.409,40.311) -14.409,41.639 cw(c-14.409,42.967) CN1.2@-15.348,42.028 ; CN1.2@-14.995,40.897 cw(c-13.202,39.104) -13.202,41.639 cw(c-13.202,44.174) CN1.2@-14.995,42.381 ; IC1.2 -13.324,27.034 -12.816,27.542 -9.768,27.542 -9.387,27.923 -9.387,41.004 -10.022,41.639 CN1.2 -18.531,41.639
NetCN2_1: CN2.1 R4.2 | length 8.2
  Top Layer w0.5: -17.965,55.101 cw(c-17.965,53) CN2.1@-16.479,54.486 ; -17.351,55.101 ccw(c-17.351,56.813) CN2.1@-16.129,55.613 ; CN2.1@-16.486,55.964 cw(c-18.543,57.984) R4.2 -15.864,55.101 CN2.1
NetCN2_2: CN2.2 D2.2 IC2.2 Q2.3 | length 42.8
  Top Layer w0.5: IC2.2 -22.341,49.894 -22.087,50.148 -13.451,50.148 -12.816,50.783 -12.816,59.927 -13.197,60.308 CN2.2 Q2.3 -18.785,60.378 D2.2 ; -18.785,60.743 ccw(c-18.345,60.743) Q2.3@-18.656,60.432 ; CN2.2@-16.479,59.566 ccw(c-18.272,57.773) -18.272,60.308 ccw(c-18.272,62.843) CN2.2@-16.479,61.05 ; CN2.2@-16.126,59.919 ccw(c-17.065,58.98) -17.065,60.308 ccw(c-17.065,61.636) CN2.2@-16.126,60.697 ; CN2.2@-15.348,59.919 cw(c-14.409,58.98) -14.409,60.308 cw(c-14.409,61.636) CN2.2@-15.348,60.697 ; CN2.2@-14.995,59.566 cw(c-13.202,57.773) -13.202,60.308 cw(c-13.202,62.843) CN2.2@-14.995,61.05
NetCN3_1: CN3.1 D3.2 | length 15.5
  Top Layer w1: CN3.1@-50.847,62.398 ccw(c-52.212,63.763) -50.281,63.763 ccw(c-48.35,63.763) CN3.1@-49.715,62.398 ; CN3.1 -50.281,65.007 -49.394,65.894 D3.2 ; D3.2@-44.245,65.529 ccw(c-45.126,64.648) -45.126,65.894 ccw(c-45.126,67.14) D3.2@-44.245,66.259
NetCN4_1: CN4.1 RLY1.2 RLY1.9 | length 38.6
  Bottom Layer w1: -82.845,16.672 ccw(c-81.474,18.044) CN4.1@-80.962,16.173 ; CN4.1@-81.673,15.912 ccw(c-82.539,15.315) -82.539,16.366 ; CN4.1@-81.673,16.82 cw(c-82.539,17.417) -82.539,16.366 ; CN4.1@-81.226,17.138 cw(c-81.997,19.956) -84.063,17.89 ; CN4.1 -82.539,16.366 ; RLY1.2@-80.028,29.672 ccw(c-80.711,28.989) -80.711,29.955 ccw(c-80.711,30.921) RLY1.2@-80.028,30.238 ; RLY1.2@-79.462,29.672 cw(c-78.779,28.989) -78.779,29.955 cw(c-78.779,30.921) RLY1.2@-79.462,30.238 ; RLY1.9@-72.408,29.672 ccw(c-73.091,28.989) -73.091,29.955 ccw(c-73.091,30.921) RLY1.9@-72.408,30.238 ; RLY1.9 RLY1.2 -82.793,29.955 -84.063,28.685 -84.063,17.89 ; -84.063,17.89 -82.539,16.366
NetCN4_3: CN4.3 RLY1.4 RLY1.7 | length 26.2
  Bottom Layer w1: RLY1.4 RLY1.7 -70.347,24.875 -69.712,24.24 -69.712,20.684 -70.855,19.541 CN4.3 ; RLY1.4@-79.462,24.592 cw(c-78.779,23.909) -78.779,24.875 cw(c-78.779,25.841) RLY1.4@-79.462,25.158 ; RLY1.7@-72.408,24.592 ccw(c-73.091,23.909) -73.091,24.875 ccw(c-73.091,25.841) RLY1.7@-72.408,25.158 ; RLY1.7@-71.842,24.592 cw(c-71.159,23.909) -71.159,24.875 cw(c-71.159,25.841) RLY1.7@-71.842,25.158 ; CN4.3@-71.421,16.932 ccw(c-72.786,18.297) -70.855,18.297 ccw(c-68.924,18.297) CN4.3@-70.289,16.932
NetCN5_1: CN5.1 RLY2.2 RLY2.9 | length 37.3
  Bottom Layer w1: -46.737,16.759 ccw(c-45.248,18.248) CN5.1@-44.915,16.169 ; RLY2.2@-45.865,29.926 ccw(c-46.548,29.243) -46.548,30.209 ccw(c-46.548,31.175) RLY2.2@-45.865,30.492 ; CN5.1@-45.637,15.961 ccw(c-46.344,15.546) -46.344,16.366 ; CN5.1@-45.637,16.771 cw(c-46.344,17.186) -46.344,16.366 ; RLY2.2@-45.299,29.926 cw(c-44.616,29.243) -44.616,30.209 cw(c-44.616,31.175) RLY2.2@-45.299,30.492 ; CN5.1@-45.073,17.156 cw(c-45.63,20.636) -48.122,18.144 ; CN5.1 -46.344,16.366 ; RLY2.9@-38.245,29.926 ccw(c-38.928,29.243) -38.928,30.209 ccw(c-38.928,31.175) RLY2.9@-38.245,30.492 ; RLY2.9 RLY2.2 -47.487,30.209 -48.122,29.574 -48.122,18.144 ; -48.122,18.144 -46.344,16.366
NetCN5_3: CN5.3 RLY2.4 RLY2.7 | length 31.8
  Bottom Layer w1: RLY2.4 RLY2.7 -36.819,25.129 -35.803,24.113 ; RLY2.4@-45.299,24.846 cw(c-44.616,24.163) -44.616,25.129 cw(c-44.616,26.095) RLY2.4@-45.299,25.412 ; RLY2.7@-38.245,24.846 ccw(c-38.928,24.163) -38.928,25.129 ccw(c-38.928,26.095) RLY2.7@-38.245,25.412 ; RLY2.7@-37.882,24.737 cw(c-37.422,22.494) -35.803,24.113 ; RLY2.7@-37.679,24.846 cw(c-36.996,24.163) -36.996,25.129 cw(c-36.996,26.095) RLY2.7@-37.679,25.412 ; -35.803,18.336 ccw(c-32.817,18.336) CN5.3@-34.928,16.225 ; -35.803,20.75 ccw(c-30.403,20.75) CN5.3@-34.221,16.932 ; CN5.3 -35.803,17.382 -35.803,24.113
NetCN6_1: CN6.1 RLY3.2 RLY3.9 | length 31.4
  Bottom Layer w1: CN6.1@-63.547,16.932 ccw(c-64.912,18.297) -62.981,18.297 ccw(c-61.05,18.297) CN6.1@-62.415,16.932 ; CN6.1 -62.981,19.414 -64.124,20.557 -64.124,29.193 -63.362,29.955 RLY3.2 RLY3.9 ; RLY3.2@-61.867,29.672 ccw(c-62.55,28.989) -62.55,29.955 ccw(c-62.55,30.921) RLY3.2@-61.867,30.238 ; RLY3.2@-61.301,29.672 cw(c-60.618,28.989) -60.618,29.955 cw(c-60.618,30.921) RLY3.2@-61.301,30.238 ; RLY3.9@-54.247,29.672 ccw(c-54.93,28.989) -54.93,29.955 ccw(c-54.93,30.921) RLY3.9@-54.247,30.238
NetCN6_3: CN6.3 RLY3.4 RLY3.7 | length 25.9
  Bottom Layer w1: RLY3.4 RLY3.7 -52.313,24.875 -51.932,24.494 -51.932,19.795 -52.821,18.906 CN6.3 ; RLY3.4@-61.301,24.592 cw(c-60.618,23.909) -60.618,24.875 cw(c-60.618,25.841) RLY3.4@-61.301,25.158 ; RLY3.7@-54.247,24.592 ccw(c-54.93,23.909) -54.93,24.875 ccw(c-54.93,25.841) RLY3.7@-54.247,25.158 ; RLY3.7@-53.681,24.592 cw(c-52.998,23.909) -52.998,24.875 cw(c-52.998,25.841) RLY3.7@-53.681,25.158 ; CN6.3@-53.387,16.932 ccw(c-54.752,18.297) -52.821,18.297 ccw(c-50.89,18.297) CN6.3@-52.255,16.932
NetCN7_1: CN7.1 RLY4.2 RLY4.9 | length 36.4
  Bottom Layer w1: RLY4.2@-31.514,29.799 ccw(c-32.197,29.116) -32.197,30.082 ccw(c-32.197,31.048) RLY4.2@-31.514,30.365 ; RLY4.2@-30.948,29.799 cw(c-30.265,29.116) -30.265,30.082 cw(c-30.265,31.048) RLY4.2@-30.948,30.365 ; CN7.1@-27.479,16.932 ccw(c-28.844,18.297) -26.913,18.297 ccw(c-24.982,18.297) CN7.1@-26.347,16.932 ; CN7.1 -26.913,18.398 -27.802,19.287 -32.755,19.287 -33.39,19.922 -33.39,29.574 -32.882,30.082 RLY4.2 RLY4.9 ; RLY4.9@-23.894,29.799 ccw(c-24.577,29.116) -24.577,30.082 ccw(c-24.577,31.048) RLY4.9@-23.894,30.365
NetCN7_3: CN7.3 RLY4.4 RLY4.7 | length 28.9
  Bottom Layer w1: RLY4.4 RLY4.7 -21.706,25.002 -20.563,23.859 -20.563,20.557 -19.42,19.414 -17.515,19.414 -16.753,18.652 CN7.3 ; RLY4.4@-30.948,24.719 cw(c-30.265,24.036) -30.265,25.002 cw(c-30.265,25.968) RLY4.4@-30.948,25.285 ; RLY4.7@-23.894,24.719 ccw(c-24.577,24.036) -24.577,25.002 ccw(c-24.577,25.968) RLY4.7@-23.894,25.285 ; RLY4.7@-23.328,24.719 cw(c-22.645,24.036) -22.645,25.002 cw(c-22.645,25.968) RLY4.7@-23.328,25.285 ; CN7.3@-17.319,16.932 ccw(c-18.684,18.297) -16.753,18.297 ccw(c-14.822,18.297) CN7.3@-16.187,16.932
NetCN8_J3_1: CN8.J3_1 R11.1 | length 4.5
  Top Layer w0.5: CN8.J3_1 R11.1 ; CN8.J3_1@-70.053,63.965 cw(c-69.072,62.984) -69.072,64.372 cw(c-69.072,65.76) CN8.J3_1@-70.053,64.779
NetD4_1: D4.1 IC6.K IC8.3 RLY1.10 | length 17.3
  Top Layer w0.5: D4.1 -75.62,34.974 ; IC8.3 -75.484,35.11 -75.62,34.974 ; RLY1.10@-72.585,32.035 ccw(c-73.694,30.926) -73.694,32.495 ccw(c-73.694,34.064) RLY1.10@-72.585,32.955 ; RLY1.10@-71.665,32.035 cw(c-70.556,30.926) -70.556,32.495 cw(c-70.556,34.064) RLY1.10@-71.665,32.955 ; -70.683,32.495 cw(c-70.683,31.304) IC6.K@-69.841,32.146 ; -70.364,32.495 ccw(c-70.364,33.235) IC6.K@-69.841,32.712 ; IC6.K -69.524,32.495 RLY1.10 -74.538,32.495 -75.3,33.257 -75.3,34.654 -75.62,34.974
NetD5_1: D5.1 IC7.K IC9.3 RLY2.10 | length 17.4
  Top Layer w0.5: D5.1 -41.711,35.355 ; IC9.3 -41.575,35.491 -41.711,35.355 ; RLY2.10@-38.422,32.289 ccw(c-39.531,31.18) -39.531,32.749 ccw(c-39.531,34.318) RLY2.10@-38.422,33.209 ; RLY2.10@-37.502,32.289 cw(c-36.393,31.18) -36.393,32.749 cw(c-36.393,34.318) RLY2.10@-37.502,33.209 ; -36.52,32.749 cw(c-36.52,31.558) IC7.K@-35.678,32.4 ; -36.201,32.749 ccw(c-36.201,33.489) IC7.K@-35.678,32.966 ; IC7.K -35.361,32.749 RLY2.10 -40.629,32.749 -41.391,33.511 -41.391,35.035 -41.711,35.355
NetD6_1: D6.1 IC10.K IC12.3 RLY3.10 | length 17.5
  Top Layer w0.5: D6.1 -57.84,35.228 ; IC12.3 -57.577,35.491 -57.84,35.228 ; RLY3.10@-54.424,32.035 ccw(c-55.533,30.926) -55.533,32.495 ccw(c-55.533,34.064) RLY3.10@-54.424,32.955 ; RLY3.10@-53.504,32.035 cw(c-52.395,30.926) -52.395,32.495 cw(c-52.395,34.064) RLY3.10@-53.504,32.955 ; -52.522,32.495 cw(c-52.522,31.304) IC10.K@-51.68,32.146 ; -52.203,32.495 ccw(c-52.203,33.235) IC10.K@-51.68,32.712 ; IC10.K -51.363,32.495 RLY3.10 -56.631,32.495 -57.266,33.13 -57.266,34.654 -57.84,35.228
NetD7_1: D7.1 IC11.K IC13.3 RLY4.10 | length 18.8
  Top Layer w0.5: D7.1 -27.487,35.101 ; IC13.3 -27.351,35.237 -27.487,35.101 ; RLY4.10@-24.071,32.162 ccw(c-25.18,31.053) -25.18,32.622 ccw(c-25.18,34.191) RLY4.10@-24.071,33.082 ; RLY4.10@-23.151,32.162 cw(c-22.042,31.053) -22.042,32.622 cw(c-22.042,34.191) RLY4.10@-23.151,33.082 ; IC11.K@-21.227,31.315 ccw(c-21.91,31.998) -20.944,31.998 ccw(c-19.978,31.998) IC11.K@-20.661,31.315 ; IC11.K -20.944,32.114 -21.452,32.622 RLY4.10 -26.786,32.622 -27.167,33.003 -27.167,34.781 -27.487,35.101
NetIC1_6: IC1.6 Q1.1 | length 22.1
  Top Layer w0.25: Q1.1 -20.497,42.589 -20.309,42.401 -20.309,41.004 -18.785,39.48 -12.943,39.48 -12.054,38.591 IC1.6 ; Q1.1@-21.222,42.377 cw(c-20.71,41.865) -20.71,42.589 cw(c-20.71,43.313) Q1.1@-21.222,42.801 ; IC1.6@-12.195,31.108 ccw(c-12.537,31.45) -12.054,31.45 ccw(c-11.571,31.45) IC1.6@-11.913,31.108
NetIC2_6: IC2.6 Q2.1 | length 26
  Top Layer w0.25: Q2.1 -20.497,61.258 ; IC2.6@-21.212,53.206 ccw(c-21.554,53.548) -21.071,53.548 ccw(c-20.588,53.548) IC2.6@-20.93,53.206 ; IC2.6 -21.071,53.704 -20.69,54.085 -17.896,54.085 -17.007,53.196 -13.832,53.196 -13.578,53.45 -13.578,57.514 -13.959,57.895 -19.801,57.895 -20.055,58.149 -20.055,60.816 -20.497,61.258 ; Q2.1@-20.959,61.055 cw(c-20.497,60.631) -20.497,61.258 ; Q2.1@-20.959,61.461 ccw(c-20.497,61.885) -20.497,61.258
NetIC3_A: IC3.A R5.1 | length 5.9
  Top Layer w0.25: IC3.A@-39.095,62.67 cw(c-39.991,61.774) -38.724,61.774 cw(c-37.457,61.774) IC3.A@-38.353,62.67 ; R5.1@-38.918,61.379 ccw(c-39.388,61.849) -38.724,61.849 ccw(c-38.06,61.849) R5.1@-38.53,61.379 ; IC3.A@-38.918,62.847 cw(c-39.388,62.377) -38.724,62.377 cw(c-38.06,62.377) IC3.A@-38.53,62.847 ; R5.1 IC3.A
NetIC5_A: IC5.A R6.1 | length 6.1
  Top Layer w0.25: IC5.A R6.1 ; IC5.A@-60.821,46.525 cw(c-60.351,46.055) -60.351,46.719 cw(c-60.351,47.383) IC5.A@-60.821,46.913 ; IC5.A@-60.644,46.348 cw(c-59.748,45.452) -59.748,46.719 cw(c-59.748,47.986) IC5.A@-60.644,47.09 ; R6.1@-59.226,46.525 ccw(c-59.696,46.055) -59.696,46.719 ccw(c-59.696,47.383) R6.1@-59.226,46.913
NetIC6_A: IC6.A R7.2 | length 3.4
  Top Layer w0.5: IC6.A@-69.741,30.246 cw(c-70.424,29.563) -69.458,29.563 cw(c-68.492,29.563) IC6.A@-69.175,30.246 ; R7.2 IC6.A
NetIC7_A: IC7.A R8.2 | length 3.4
  Top Layer w0.5: IC7.A@-35.578,30.5 cw(c-36.261,29.817) -35.295,29.817 cw(c-34.329,29.817) IC7.A@-35.012,30.5 ; R8.2 IC7.A
NetIC10_A: IC10.A R9.2 | length 3.2
  Top Layer w0.5: IC10.A@-51.58,30.246 cw(c-52.263,29.563) -51.297,29.563 cw(c-50.331,29.563) IC10.A@-51.014,30.246 ; R9.2 IC10.A
NetIC11_A: IC11.A R10.2 | length 3.2
  Top Layer w0.5: IC11.A@-21.227,28.849 cw(c-21.91,28.166) -20.944,28.166 cw(c-19.978,28.166) IC11.A@-20.661,28.849 ; R10.2 IC11.A
P5V: C9.1 C10.1 C11.1 PW1.3 R11.2 | length 56.7
  Top Layer w0.5: R11.2 -65.902,64.372 -65.394,63.864 -65.394,51.418 -64.505,50.529 -43.804,50.529 ; C9.1@-43.555,46.065 ccw(c-44.494,47.004) -43.166,47.004 ccw(c-41.838,47.004) C9.1@-42.777,46.065 ; C11.1@-43.457,49.53 ccw(c-44.661,49.671) -43.804,50.529 ; C11.1@-43.398,49.633 ccw(c-43.644,49.96) -43.235,49.96 ; C10.1@-43.376,47.521 cw(c-43.884,47.013) -43.166,47.013 ; C11.1 C11.1@-43.235,49.44 ; C10.1 C11.1@-43.235,49.44 ; -43.235,48.975 ccw(c-43.846,48.975) -43.414,49.407 cw(c-44.013,48.808) -43.166,48.808 ; C9.1 C10.1@-43.166,48.243 ; -43.166,48.711 cw(c-43.884,48.711) -43.376,48.203 ccw(c-43.718,48.545) -43.235,48.545 ccw(c-42.752,48.545) C10.1@-43.094,48.203 ; C10.1@-43.094,47.921 cw(c-42.009,46.836) -42.009,48.37 ; PW1.3@-40.073,47.91 ccw(c-41.182,46.801) -41.182,48.37 ccw(c-41.182,49.939) PW1.3@-40.073,48.83 ; PW1.3 -43.039,48.37 C10.1@-43.166,48.243 ; -43.804,50.529 -43.235,49.96 ; C11.1@-43.235,49.44 -43.235,49.96 ; C11.1@-43.235,49.44 -43.166,49.371 C10.1@-43.166,48.243
P24V: C6.1 C7.1 C8.1 C12.1 C13.1 CE1.1 D3.1 D4.3 D5.3 D6.3 D7.3 IC4.1 PW1.1 R5.2 R7.1 R8.1 R9.1 R10.1 RLY1.1 RLY2.1 RLY3.1 RLY4.1 | length 307.8
  Top Layer w0.25: D3.1 -39.115,59.294 ; D3.1@-42.259,58.841 cw(c-41.164,57.746) -41.164,59.294 cw(c-41.164,60.842) D3.1@-42.259,59.747 ; D3.1@-42.082,58.664 cw(c-40.561,57.143) -40.561,59.294 cw(c-40.561,61.445) D3.1@-42.082,59.924 ; -40.332,59.294 ccw(c-40.332,61.293) R5.2@-38.918,59.879 ; -39.728,59.294 ccw(c-39.728,60.689) R5.2@-38.742,59.703 ; -39.125,59.294 ccw(c-39.125,60.086) R5.2@-38.565,59.526 ; R5.2@-38.996,59.647 cw(c-39.411,59.59) -39.115,59.294 ; R5.2@-38.762,59.413 ccw(c-38.819,58.998) -39.115,59.294 ; R5.2 -39.115,59.294 ; R10.1@-21.138,25.709 cw(c-21.915,24.932) -20.817,24.932 ; R10.1 -20.817,25.776 -20.817,23.986
  Top Layer w0.3: C8.1@-43.485,51.722 ccw(c-44.088,52.325) -43.235,52.325 ; C7.1@-43.447,52.784 cw(c-43.959,52.272) -43.235,52.272 cw(c-42.511,52.272) C7.1@-43.023,52.784 ; C8.1 -43.235,51.618 C7.1 ; -43.235,51.972 ccw(c-42.881,51.972) C8.1@-43.131,51.722
  Top Layer w1: RLY1.1@-80.028,32.212 ccw(c-80.711,31.529) -80.711,32.495 ccw(c-80.711,33.461) -80.028,32.778 ccw(c-80.88,33.63) -79.675,33.63 ; D4.3 -79.675,32.565 RLY1.1 -83.301,32.495 ; R7.1 -64.874,27.173 -64.759,27.288 ; RLY3.1@-61.867,32.212 ccw(c-62.55,31.529) -62.55,32.495 ccw(c-62.55,33.461) RLY3.1@-61.867,32.778 ; D6.3 -63.489,36.178 -64.759,34.908 -64.759,32.495 ; RLY3.1 -64.759,32.495 ; IC4.1 C12.1 ; C13.1 -52.301,37.69 -52.059,37.448 -49.9,37.448 -49.519,37.067 -49.519,35.543 ; R9.1 -49.761,27.3 -49.519,27.542 ; CE1.1@-51.071,54.234 ccw(c-52.352,55.515) -50.541,55.515 ccw(c-48.73,55.515) CE1.1@-50.011,54.234 ; CE1.1 -50.541,58.143 -49.39,59.294 ; RLY2.1@-45.865,32.466 ccw(c-46.548,31.783) -46.548,32.749 ccw(c-46.548,33.715) RLY2.1@-45.865,33.032 ; D5.3 -48.757,36.305 -49.519,35.543 ; RLY2.1 -49.392,32.749 -49.519,32.622 ; D3.1@-44.245,58.929 ccw(c-45.126,58.048) -45.126,59.294 ccw(c-45.126,60.54) D3.1@-44.245,59.659 ; D3.1@-43.661,58.929 cw(c-44.689,57.901) -43.235,57.901 ; C6.1@-43.505,55.043 cw(c-44.157,54.391) -43.235,54.391 ; C6.1@-43.505,55.667 ccw(c-44.157,56.319) -43.235,56.319 ; -43.235,58.196 cw(c-42.198,58.196) D3.1@-42.931,58.929 ; PW1.1@-39.896,53.167 ccw(c-40.579,52.484) -40.579,53.45 ccw(c-40.579,54.416) PW1.1@-39.896,53.733 ; PW1.1 -42.981,53.45 C7.1 -43.235,59.233 D3.1 -49.39,59.294 ; R8.1 -33.402,27.427 -33.39,27.415 ; RLY4.1@-31.514,32.339 ccw(c-32.197,31.656) -32.197,32.622 ccw(c-32.197,33.588) RLY4.1@-31.514,32.905 ; D7.3 -32.755,36.051 -33.39,35.416 -33.39,32.622 ; RLY4.1 -33.39,32.622 ; -20.817,23.986 -20.817,20.557 -22.214,19.16 -33.39,19.16 ; -83.301,32.495 -83.301,20.176 -82.285,19.16 -64.759,19.16 ; -83.301,32.495 -83.301,35.543 -81.65,37.194 -81.65,66.15 -80.38,67.42 -62.219,67.42 -61.457,66.658 -61.457,60.181 -60.57,59.294 -49.39,59.294 ; -64.759,19.16 -49.519,19.16 ; -64.759,19.16 -64.759,27.288 ; -64.759,27.288 -64.759,32.495 ; -49.519,19.16 -33.39,19.16 ; -49.519,19.16 -49.519,27.542 ; -49.519,27.542 -49.519,32.622 ; -49.519,32.622 -49.519,35.543 ; -33.39,19.16 -33.39,27.415 ; -33.39,27.415 -33.39,32.622
RELAY_1: CN8.J4_10 IC8.1 | length 58.1
  Bottom Layer w0.25: v1@-72.379,34.837 cw(c-72.379,32.826) -70.957,34.248 ; v1@-72.379,35.087 cw(c-72.379,33.68) -71.384,34.675 ; v1(-72.379,35.162) -71.871,35.162 ; v1@-72.379,35.337 cw(c-72.379,34.533) -71.811,35.102 ; v1@-72.084,35.026 cw(c-71.871,34.928) -71.871,35.162 ; v1@-72.084,35.298 ccw(c-71.871,35.396) -71.871,35.162 ; CN8.J4_10@-30.315,41.017 cw(c-31.51,39.822) -29.82,39.822 cw(c-28.13,39.822) CN8.J4_10@-29.325,41.017 ; CN8.J4_10@-30.138,41.194 cw(c-30.906,40.426) -29.82,40.426 cw(c-28.734,40.426) CN8.J4_10@-29.502,41.194 ; CN8.J4_10 -29.82,34.922 -30.596,34.146 -70.855,34.146 -71.871,35.162
RELAY_2: CN8.J4_9 IC12.1 | length 38.1
  Bottom Layer w0.25: v1@-54.472,34.837 cw(c-54.472,34.052) -53.917,34.607 cw(c-53.362,35.162) v1@-54.147,35.162 ; v1(-54.472,35.162) -53.866,34.556 -31.612,34.556 -31.231,34.937 -31.231,43.29 ; -30.997,43.524 cw(c-30.429,42.956) CN8.J4_9@-30.039,43.659 ; -30.762,43.759 cw(c-30.261,43.258) CN8.J4_9@-29.917,43.877 ; CN8.J4_9@-30.16,43.44 ccw(c-30.596,42.655) -31.231,43.29 ; CN8.J4_9 -30.469,44.052 -31.231,43.29
RELAY_3: CN8.J4_8 IC9.1 | length 26.5
  Top Layer w0.25: IC9.1@-38.888,35.143 cw(c-38.376,34.631) -38.376,35.355 cw(c-38.376,36.079) IC9.1@-38.888,35.567 ; IC9.1@-38.706,35.267 ccw(c-38.857,35.831) v1@-38.282,35.727 ; IC9.1@-38.701,35.355 ccw(c-38.701,36.175) v1@-38.024,35.712 ; -38.514,35.318 ccw(c-38.715,36.068) v1@-38.028,35.705 ; -38.325,35.369 ccw(c-38.428,35.754) v1@-38.036,35.683 ; v1@-38.23,35.853 cw(c-39.175,36.499) IC9.1 -38.277,35.355 v1(-37.962,35.67)
  Bottom Layer w0.25: v1(-37.962,35.67) -32.374,35.67 -31.739,36.305 -31.739,45.703 -30.85,46.592 ; v1@-37.732,35.44 cw(c-37.177,34.885) -37.177,35.67 cw(c-37.177,36.455) v1@-37.732,35.9 ; CN8.J4_8@-30.471,46.334 ccw(c-30.85,46.184) -30.85,46.592 ; CN8.J4_8@-30.471,46.85 cw(c-30.85,47) -30.85,46.592 ; CN8.J4_8 -30.85,46.592
RELAY_4: CN8.J4_7 IC13.1 | length 23
  Bottom Layer w0.25: CN8.J4_7 -29.072,49.132 -28.437,48.497 ; CN8.J4_7@-29.701,48.971 cw(c-29.311,48.444) -28.848,48.908 ; CN8.J4_7@-29.553,48.77 cw(c-29.137,48.208) -28.642,48.702 ; CN8.J4_7@-29.404,48.569 cw(c-28.962,47.972) -28.437,48.497 ; v1@-24.476,34.932 ccw(c-25.031,34.377) -25.031,35.162 ccw(c-25.031,35.947) v1@-24.476,35.392 ; v1(-24.246,35.162) -27.802,35.162 -28.437,35.797 -28.437,48.497
pads on no net: CN8.J1_1 CN8.J1_2 CN8.J1_3 CN8.J1_4 CN8.J1_5 CN8.J1_6 CN8.J1_7 CN8.J1_8 CN8.J1_9 CN8.J1_10 CN8.J2_2 CN8.J2_3 CN8.J2_4 CN8.J2_5 CN8.J2_6 CN8.J2_7 CN8.J2_10 CN8.J3_3 CN8.J3_4 CN8.J3_5 CN8.J3_6 CN8.J3_7 CN8.J3_8 CN8.J3_9 CN8.J3_10 CN8.J4_1 CN8.J4_2 CN8.J4_3 CN8.J4_4 CN8.J4_5 CN8.J4_6 D4.2 D5.2 D6.2 D7.2 FID8_1.0 FID8_1_1.0 FID10_1.0 FID10_1_1.0 RLY1.5 RLY1.6 RLY2.5 RLY2.6 RLY3.5 RLY3.6 RLY4.5 RLY4.6 SN1.0 SN2.0 SN3.0 SN4.0 TOOLHOLE1_1.TOOL TOOLHOLE1_1_1.TOOL TOOLHOLE5_1.TOOL1 TOOLHOLE5_1_1.TOOL1

## Polygon pours and split planes (outlines as drawn)
DGND on Bottom Layer "Bottom Layer-No Net" (solid, remove dead copper, pour order 4): -88,9 -88,69 -8,69 -8,9
DGND on Top Layer "Bottom Layer-No Net" (solid, remove dead copper, pour order 3): -88,9 -88,69 -8,69 -8,9

## Keep-outs
Keep-Out Layer:
  lines w0.5: -88,9 -88,69 -8,69 -8,9 -88,9

## Silkscreen, mask and mechanical layers (free items; w line width, h text height)
Top Overlay:
  text "5V" at -35.041,62.848 h2 r90
  text "LPCB278R0" at -82.793,51.799 h3 r90
  text "3V" at -63.997,48.37 h2
  text "SOL1" at -68.569,33.892 h2 r90
  text "SOL3" at -34.406,33.892 h2 r90
  text "SOL2" at -47.741,29.066 h2 r90
  text "SOL4" at -17.515,27.923 h2 r90
Top Paste:
  lines w1: -110.647,-36.577 -110.647,176.423 89.353,176.423 89.353,-36.577 -110.647,-36.577
Mechanical 1:
  lines w0.1: -96,0 0,0 0,79 -96,79 -96,0
  lines w0.127: -88,9 -8,9 -8,69 -88,69 -88,9
Mechanical 3:
  lines w2.4: -89.2,29.009 -89.2,7.8 -67.356,7.8 ; -89.2,35.105 -89.2,70.2 -53.259,70.2 ; -61.895,7.8 -6.8,7.8 -6.8,34.597 ; -47.163,70.2 -6.8,70.2 -6.8,40.693
Mechanical 4:
  lines w0.203: -13.842,-65.783 24.099,-65.783 ; 24.059,-76.215 -13.833,-76.223 -13.833,-44.219 24.059,-44.215 ; 24.099,-76.222 24.099,-44.222
  lines w0.305: 24.751,-73.533 100.696,-73.536 ; 24.751,-69.533 100.696,-69.523 ; 24.751,-65.777 100.696,-65.793 ; 24.756,-65.77 100.701,-65.786 ; 24.756,-62.045 100.701,-62.048 ; 24.756,-58.045 100.701,-58.035 ; 24.756,-54.045 100.701,-54.047 ; 25.059,-50.215 100.559,-50.215 176.559,-50.215 ; 25.059,-49.715 100.559,-49.715 ; 37.349,-76.972 37.349,-44.222 ; 50.099,-76.972 50.099,-44.222 ; 62.849,-76.972 62.849,-44.222 ; 74.849,-76.972 74.849,-44.222 ; 89.215,-77.01 89.215,-44.244 ; 100.701,-69.544 176.698,-69.544 ; 100.726,-62.051 176.749,-62.051 ; 111.904,-77.037 111.904,-69.544 ; 130.724,-77.037 130.724,-69.544 ; 154.617,-77.09 154.617,-69.507 ; 154.701,-69.544 154.701,-62.051
  lines w0.508: -208.29,-37.032 -203.286,-37.032 ; -208.29,7.951 -203.286,7.951 ; -208.29,52.935 -203.286,52.935 ; -208.29,97.943 -203.286,97.943 ; -208.29,142.927 -203.286,142.927 ; -208.29,187.961 -208.29,-82.041 181.702,-82.041 ; -203.286,182.957 -203.286,-77.037 176.723,-77.037 ; -143.291,-82.041 -143.291,-77.037 ; -78.293,-82.041 -78.293,-77.037 ; -13.294,-82.041 -13.294,-77.037 ; 24.809,-76.965 24.809,-44.215 176.559,-44.215 ; 51.704,-82.041 51.704,-77.037 ; 100.697,-44.259 100.701,-77.037 ; 116.703,-82.041 116.703,-77.037
  text "A" at -206.283,161.951 h3
  text "B" at -206.283,117.933 h3
  text "C" at -206.283,72.95 h3
  text "D" at -206.283,27.966 h3
  text "E" at -206.283,-17.042 h3
  text "ISSUE" at 27.559,-47.715 h2.01
  text "DATE" at 40.059,-47.715 h2.01
  text "ECN" at 53.559,-47.715 h2.01
  text "DRAWN" at 64.559,-47.715 h2.01
  text "APP" at 91.559,-47.715 h2.01
  text "SIL3 Pty Ltd" at -12.307,-47.752 h2.54
  text "CHECKED" at 76.134,-47.8 h2.01
  text ".SIL3_PROJECT" at 117.106,-48.26 h1.78
  text "PROJECT:" at 102.305,-48.389 h2.01
  text "Factory 10" at -12.459,-51.308 h1.52
  text "R1.0" at 27.16,-53.124 h2.01
  text "PCB DESCRIPTION:" at 102.559,-53.215 h2.01
  text "01.08.12" at 38.259,-53.342 h2.01
  text "LJG" at 65.768,-53.378 h2.01
  text "9-13 Dingley Avenue" at -12.459,-54.229 h1.52
  text "Dandenong, VICTORIA, 3175" at -12.459,-56.769 h1.52
  text ".SIL3_PCB_DESC" at 102.501,-58.166 h2.5
  text "AUSTRALIA" at -12.459,-59.436 h1.52
  text "F" at -206.283,-62.051 h3
  text "F" at 177.714,-62.051 h3
  text "http://www.sil3.com.au" at -12.459,-62.103 h1.52
  text "LAYER" at 155.46,-64.897 h2.01
  text "ASSY. NUMBER:" at 102.501,-65.532 h2.01
  text ".SIL3_LDLREV" at 126.123,-67.056 h3
  text ".DATE_PRINT" at 184.559,-68.215 h1.52 r90
  text "GENERAL TOLERANCE:" at -6.34,-68.831 h1.52
  text "+" at -0.752,-71.498 h1.27
  text "CLASIFFICATION:" at 154.965,-71.883 h2.01
  text "0.2 mm" at 1.788,-72.006 h1.65
  text "SCALE:" at 101.516,-72.033 h2.01
  text "SHEET" at 118.71,-72.033 h2.01
  text "-" at -0.752,-72.641 h1.27
  text "UNLESS OTHERWISE SPECIFIED" at -10.15,-75.054 h1.52
  text "1 OF 1" at 117.36,-75.438 h2.01
  text "NTS" at 102.627,-75.591 h2.01
  text "UNCLASSIFIED" at 156.235,-75.693 h2.03
  text "A3" at 177.559,-80.715 h1.78
  text "1" at -173.289,-81.05 h3
  text "2" at -113.294,-81.05 h3
  text "3" at -48.295,-81.05 h3
  text "4" at 15.713,-81.05 h3
  text "5" at 84.724,-81.05 h3
  text "6" at 145.71,-81.05 h3
  text "PRINT DATE:" at 184.521,-81.66 h1.52 r90

## Text inside footprints (layer, text, board x,y; h text height)
CN8: Top Overlay "J1" at -74.2,66.372 h2; Top Overlay "J2" at -28.5,66.372 h2; Top Overlay "J3" at -71.66,66.372 h2; Top Overlay "J4" at -31.04,66.372 h2
LBL1: Top Overlay "rloop.org" at -82.785,42.135 h1 r90